# Altium PCB PCB1.PcbDoc
Units mm, origin at the board's own origin, x right, y up, seen from the top; angles counter-clockwise.
Board outline 44.75 x 46.5 mm, 2 copper layers (Top Layer, Bottom Layer); 20 components, 24 nets, 75 pads, 0 vias.
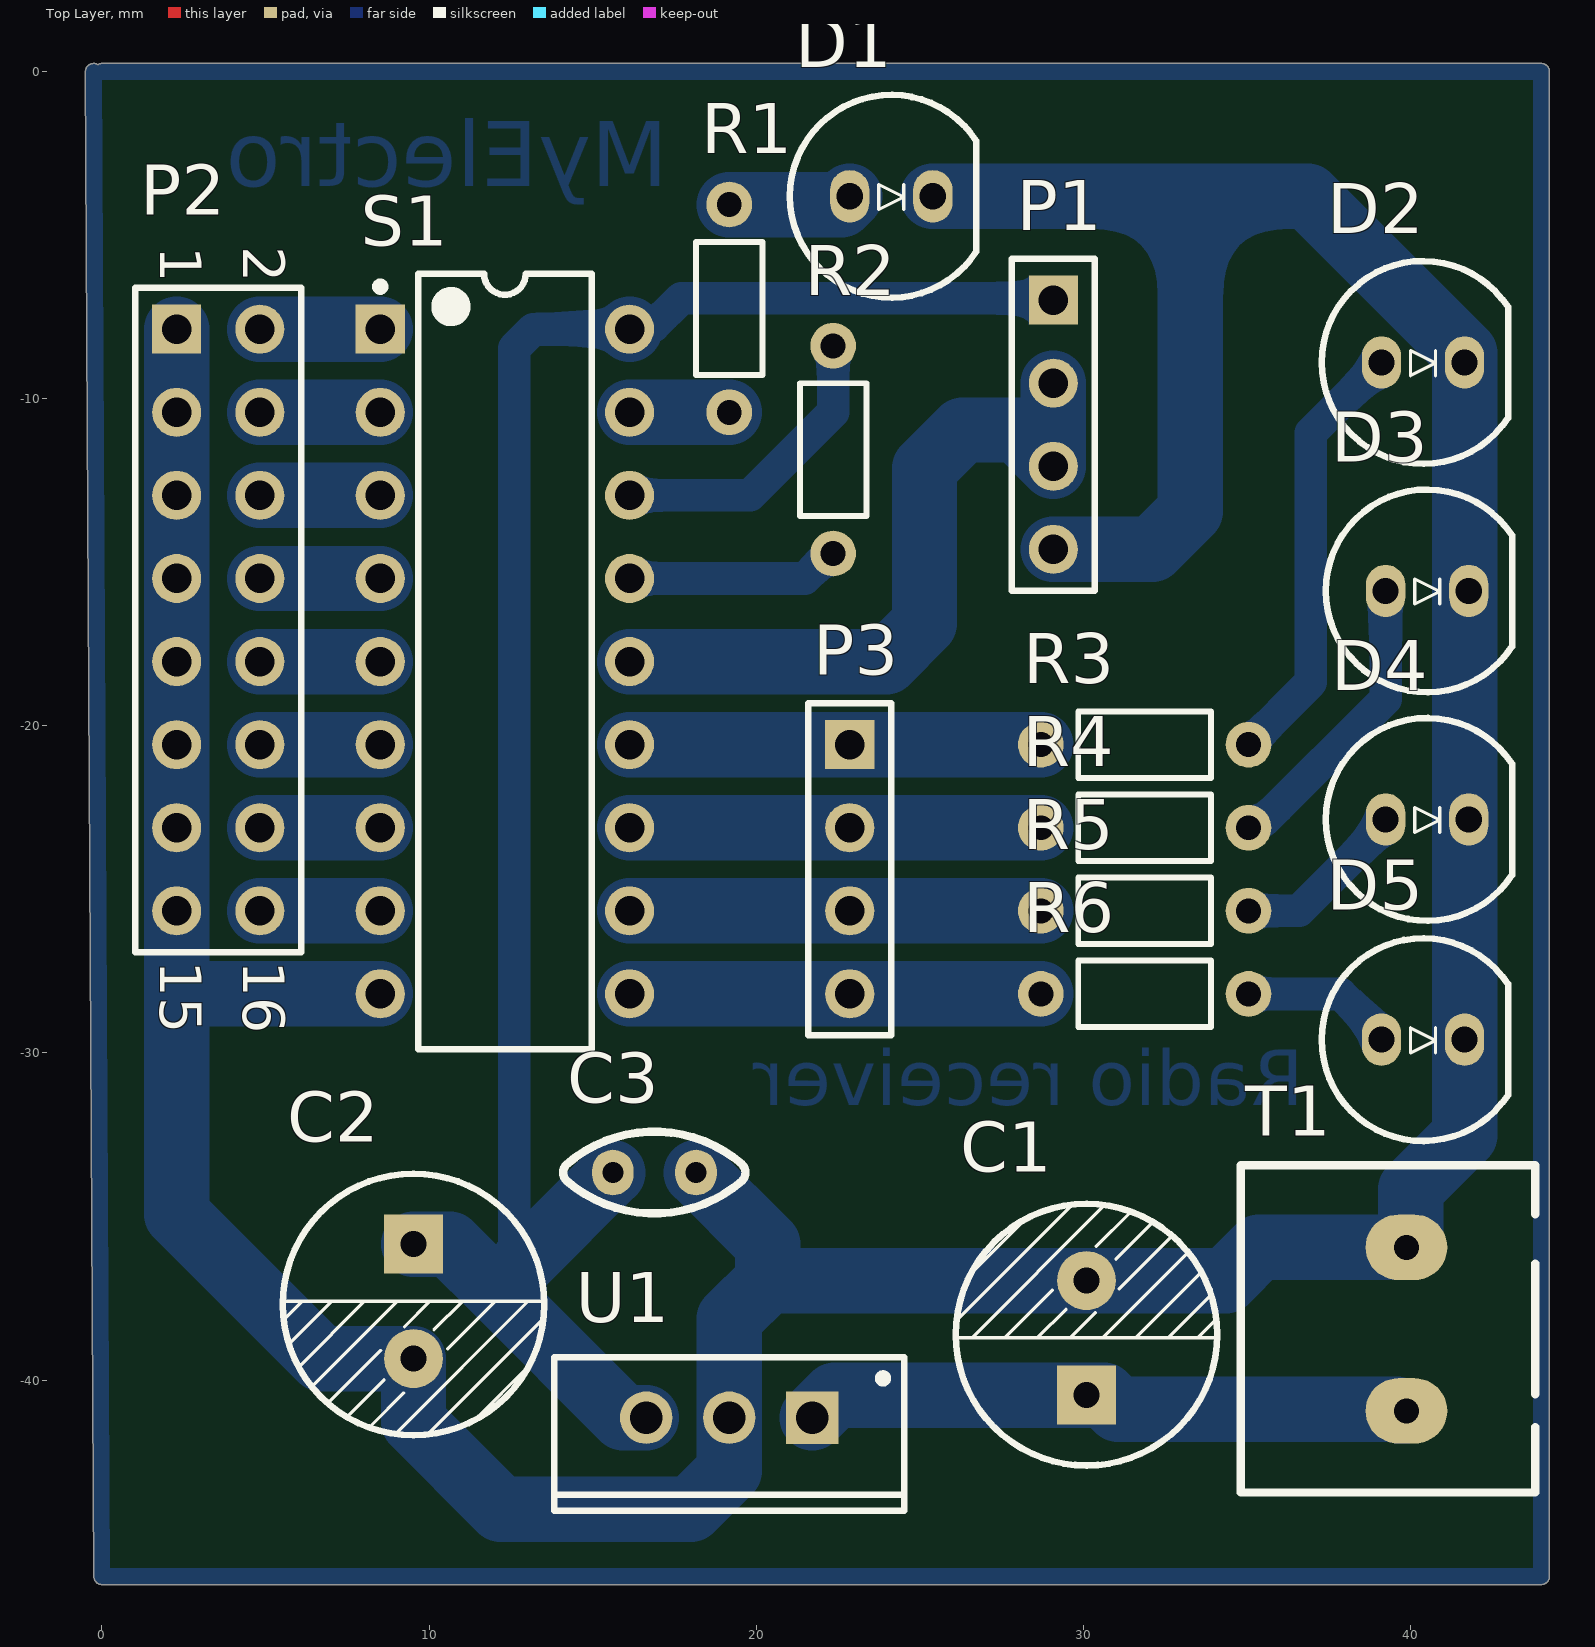
[diagram p0: Top Layer view]
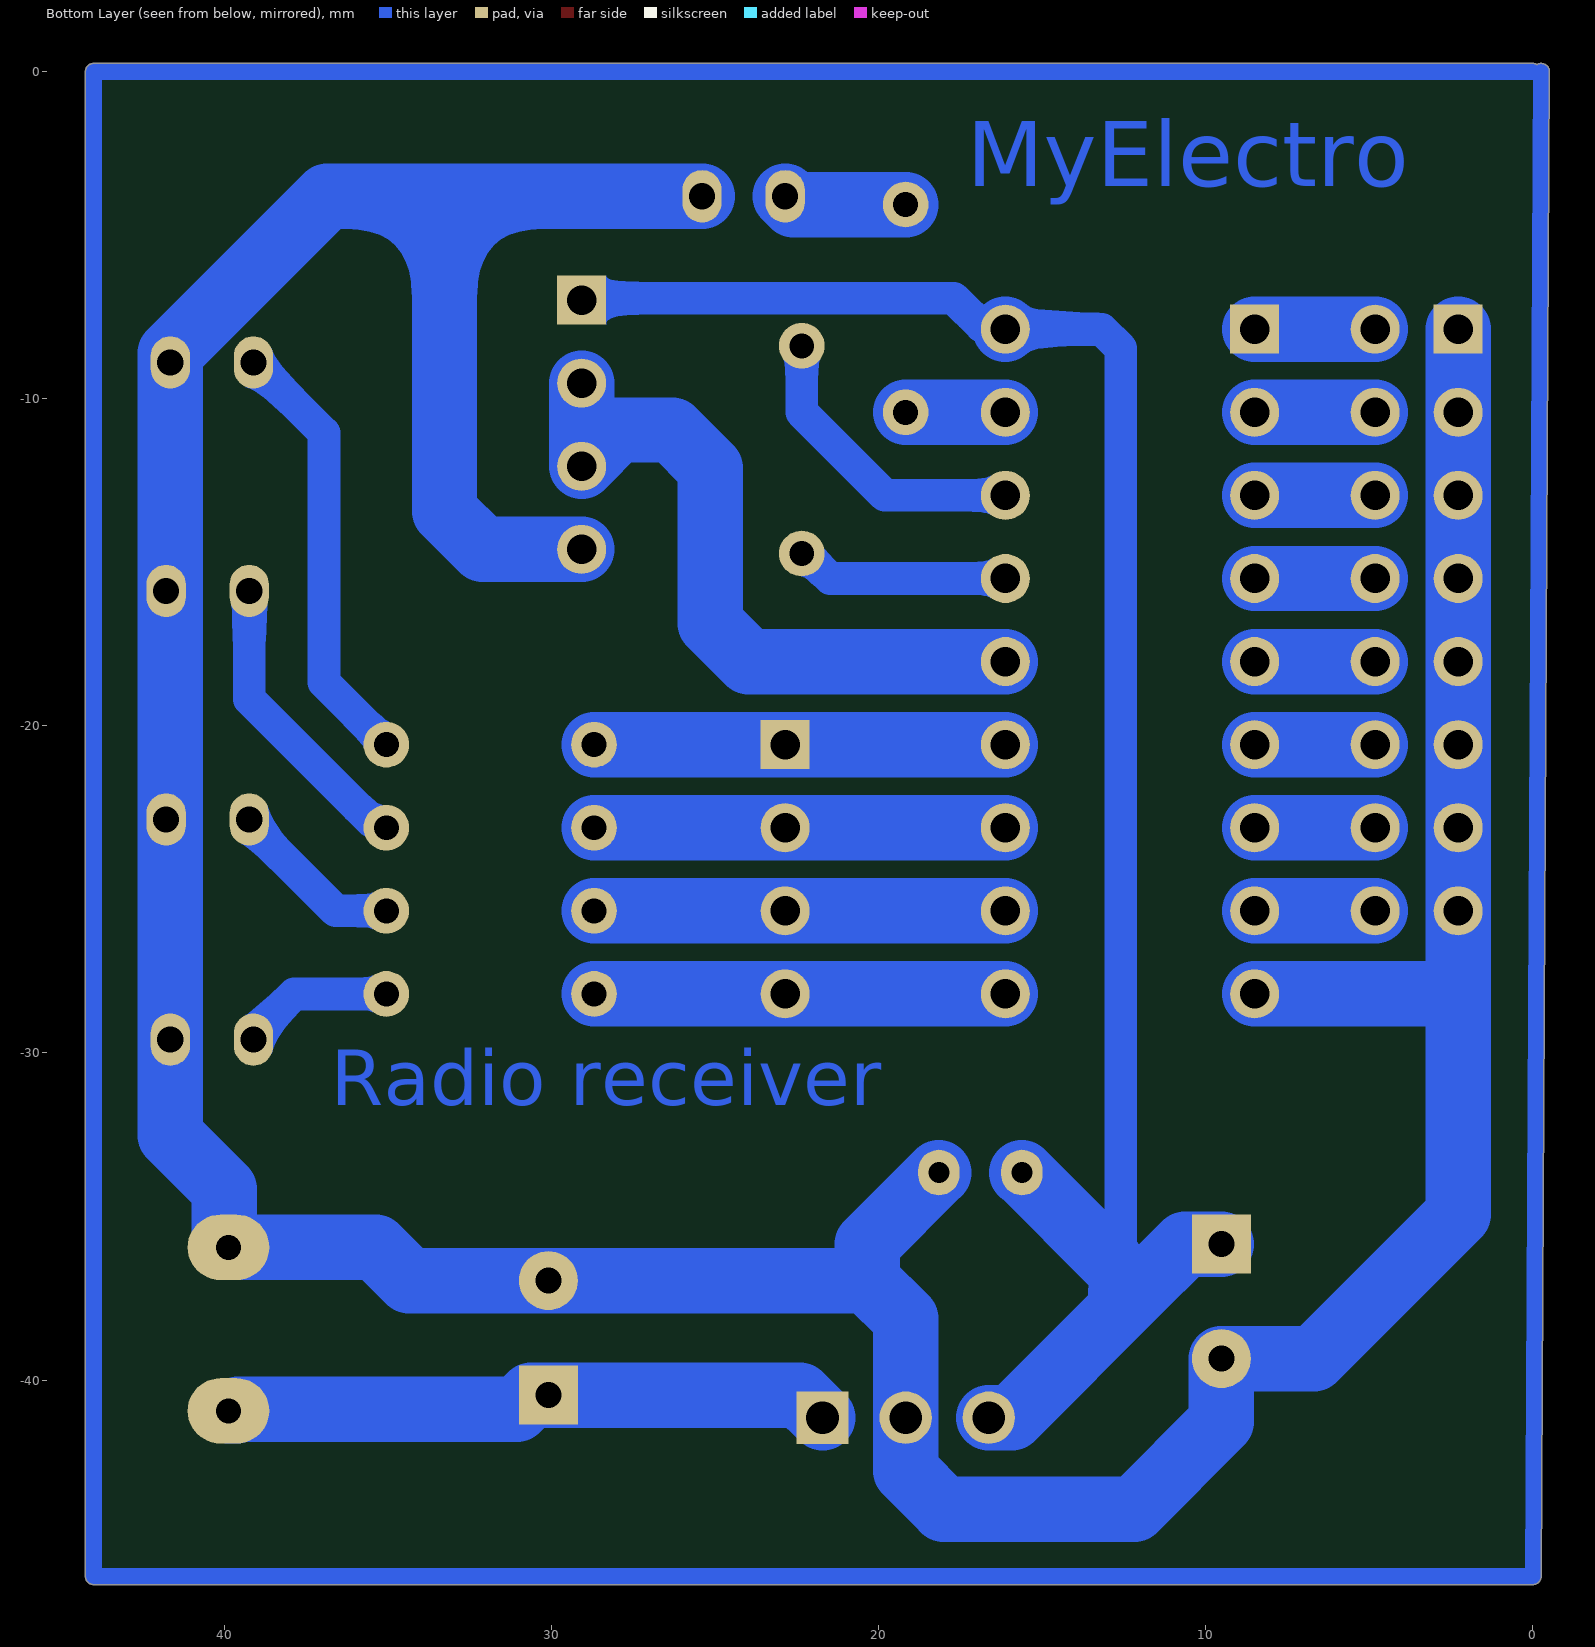
[diagram p1: Bottom Layer view, seen from below]
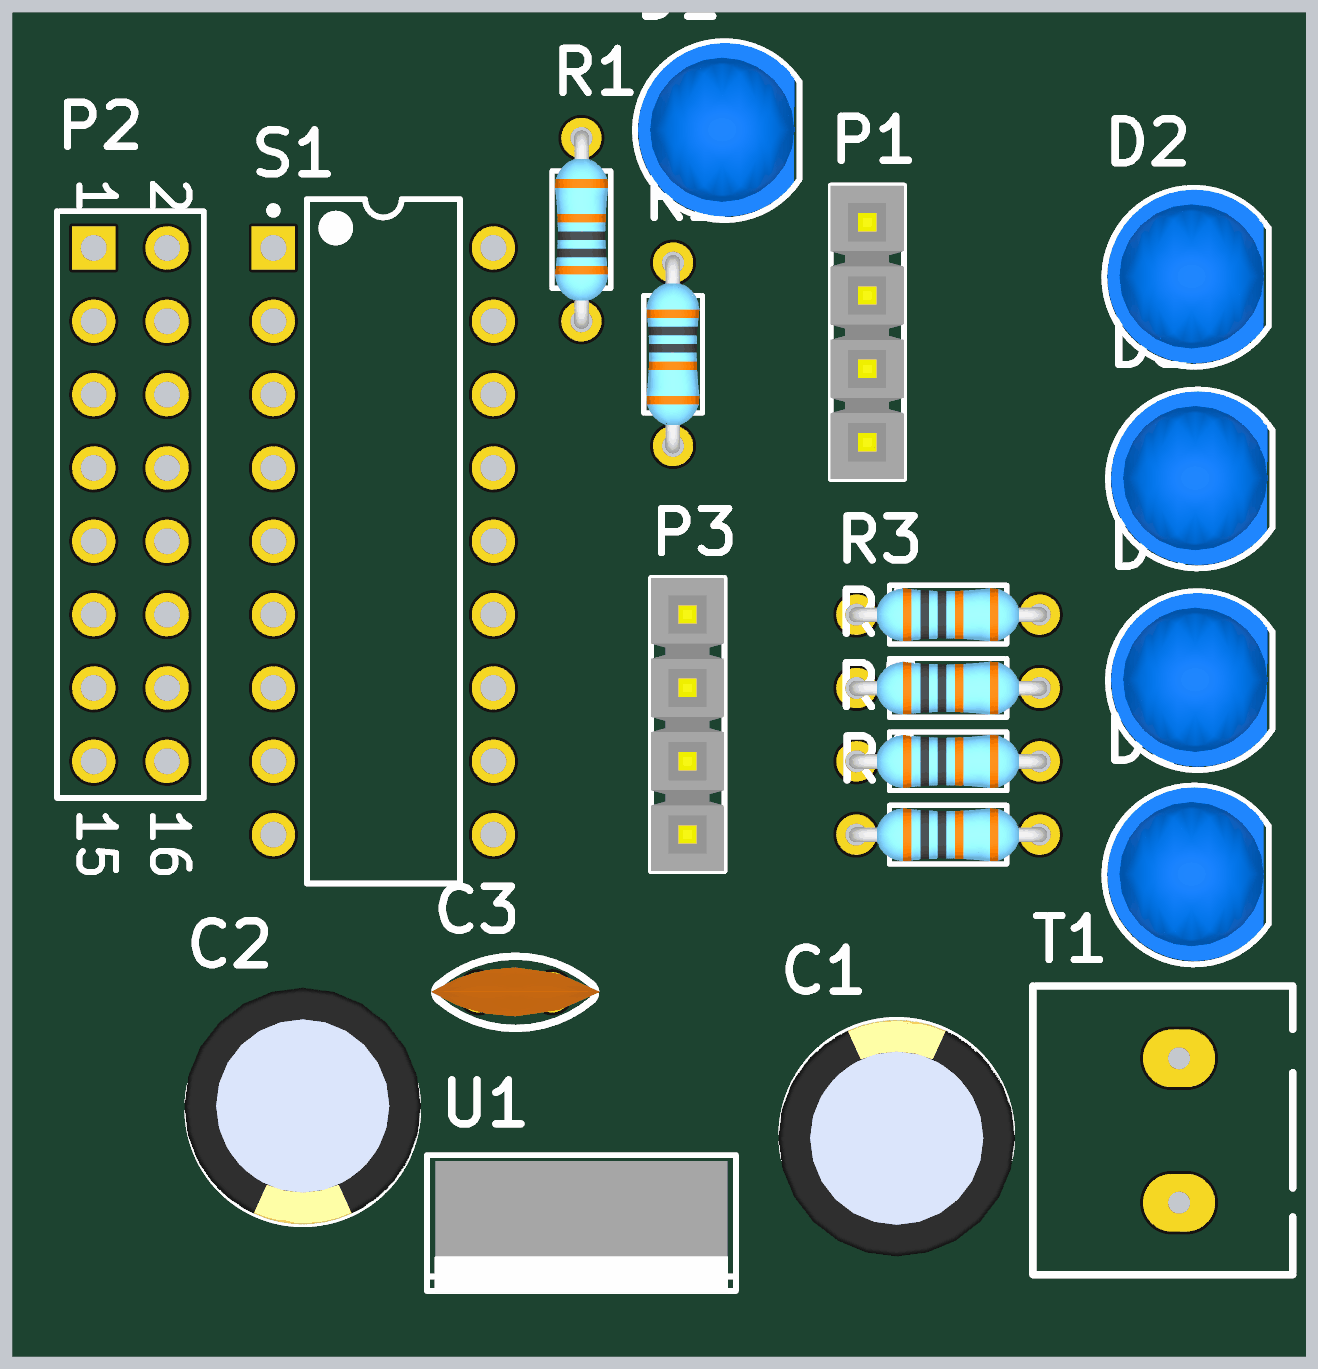
[diagram p2: 3D render of the assembled board from above, using the file's embedded part models]

## Layer stack, top to bottom
Top Solder: solder mask 0.0102, Solder Resist, Dk 3.5
Top Layer: signal copper 0.0356
Dielectric 1: dielectric 0.32, FR-4, Dk 4.8
Bottom Layer: signal copper 0.0356
Bottom Solder: solder mask 0.0102, Solder Resist, Dk 3.5

## Board outline
-0.25,-46.001 cw(c0,-45.999) -0.25,-46.001 -0.504,-0.001 cw(c-0.254,0) -0.127,0.216 cw(c0,0) 0,0.25 44,0.25 cw(c44,0) 44.25,0 44.25,-46 cw(c44,-46) 44,-46.25 0,-46.25 cw(c0,-46)

## Design rules (kind name [scope] priority, off if disabled: settings)
Clearance [All] p1: gap=0.254 ignorepadtopadclearanceinfootprint=FALSE except(0: Arc-Hole Track-Hole SMDPad-Hole THPad-Hole Via-Hole Fill-Hole Poly-Hole Region-Hole Text-Hole)
PolygonConnect [All] p1: connectstyle=Relief reliefconductorwidth=0.254 reliefentries=4 polygonreliefangle="90 Angle" airgapwidth=0.254
RoutingVias [All] p1: holewidth=0.711 width=1.27 viastyle="Through Hole" minholewidth=0.711 minwidth=1.27 maxholewidth=0.711 maxwidth=1.27
SolderMaskExpansion [All] p1: expansion=0.102 istentingtop=FALSE
Width [All] p1: maxlimit=2 minlimit=0.5 preferedwidth=1
30 further rules are at their usual default settings.

## Components (designator, comment, footprint, x,y, rotation, side; value= is the part's Value field where it differs from the comment)
C1 "100uf" "Cap electrolitic radial 8x14-3.5" 30.099,-38.707 r90 top value=1uF
C2 "100uf" "Cap electrolitic radial 8x14-3.5" 9.525,-37.592 r270 top value=1uF
C3 "100nF" Cap-100nF 16.891,-33.655 r180 top
D1 "LED 5MM" LED5MM_BLUE 24.13,-3.81 r0 top
D2 "LED 5MM" LED5MM_BLUE 40.386,-8.89 r0 top
D3 "LED 5MM" LED5MM_BLUE 40.513,-15.875 r0 top
D4 "LED 5MM" LED5MM_BLUE 40.513,-22.86 r0 top
D5 "LED 5MM" LED5MM_BLUE 40.386,-29.591 r0 top
P1 "Header 4" HDR1X4 29.083,-6.985 r270 top
P2 "Header 8X2" HDR2X8 2.286,-7.874 r270 top
P3 "Header 4" HDR1X4 22.86,-20.574 r270 top
R1 "220" RES-(1/4) 19.177,-7.239 r90 top
R2 "820K" RES-(1/4) 22.352,-11.557 r270 top
R3 "220" RES-(1/4) 31.877,-20.574 r0 top
R4 "220" RES-(1/4) 31.877,-23.114 r0 top
R5 "220" RES-(1/4) 31.877,-25.654 r0 top
R6 "220" RES-(1/4) 31.877,-28.194 r0 top
S1 "PT2272L4" DIP-18 12.319,-18.034 r0 top
T1 "Terminal" "Terminal 1*2" 43.815,-43.434 r90 top
U1 "L7805CV" "TO-220 AB" 19.177,-41.148 r180 top

## Footprints (in the part's own frame and the unit in brackets; to place one, negate y for a bottom-side part, rotate by r counter-clockwise, add the part's x,y. Pads: shape width x height; smd on the part's side, far side on the other; paste and mask are expansions set on the pad)
"Cap electrolitic radial 8x14-3.5" [mm] "Cap electrolitic radial 8x14-3.5-Design:Abbas Basereh"
  rect 1.8x1.8 hole 0.8: 1(-1.75,0)
  round 1.8 hole 0.8: 2(1.75,0)
  silkscreen extent -3.9,-4 4.1,4, body extent -4.1,-4.1 4.1,4.1, height 14.6
Cap-100nF [mil] "Bipolar Capacitor-Design:Ali Hafizi"
  oval 50x55 hole 25: 1(-50,0) 2(50,0)
  silkscreen extent -110,-49 110,49, body extent -115,-34 115,33, height 272
DIP-18 [mm] "DIP; 18 Leads; Row Spacing 7.62 mm; Pitch 2.54 mm"
  rect 1.5x1.5 hole 0.9: 1(-3.81,10.16)
  round 1.5 hole 0.9: 2(-3.81,7.62) 3(-3.81,5.08) 4(-3.81,2.54) 5(-3.81,0) 6(-3.81,-2.54) 7(-3.81,-5.08) 8(-3.81,-7.62) 9(-3.81,-10.16) 10(3.81,-10.16) 11(3.81,-7.62) 12(3.81,-5.08) 13(3.81,-2.54) 14(3.81,0) 15(3.81,2.54) 16(3.81,5.08) 17(3.81,7.62) 18(3.81,10.16)
  silkscreen extent -3.93,-11.85 2.65,11.85, body extent -3.6,-11.8 3.6,11.8, height 5.08
HDR1X4 [mm] "Connector; Header; 4 Position"
  rect 1.5x1.5 hole 0.9: 1(0,0)
  round 1.5 hole 0.9: 2(2.54,0) 3(5.08,0) 4(7.62,0)
  silkscreen extent -1.27,-1.27 8.89,1.27, body extent -1.27,-1.28 8.89,1.26, height 8.38
HDR2X8 [mm] "Connector; Header; 8x2 Position"
  rect 1.5x1.5 hole 0.9: 1(0,0)
  round 1.5 hole 0.9: 2(0,2.54) 3(2.54,0) 4(2.54,2.54) 5(5.08,0) 6(5.08,2.54) 7(7.62,0) 8(7.62,2.54) 9(10.16,0) 10(10.16,2.54) 11(12.7,0) 12(12.7,2.54) 13(15.24,0) 14(15.24,2.54) 15(17.78,0) 16(17.78,2.54)
  silkscreen extent -1.27,-1.27 19.05,3.81
LED5MM_BLUE [mm] "LED 5MM THROUGH HOLE BLUE-Designer Abbas Basereh"
  oval 1.2x1.6 hole 0.8: 1(-1.27,0) 2(1.27,0)
  silkscreen extent -3.1,-3.1 2.6,3.1, body extent -2.99,-2.98 2.43,3.04, height 12.31
RES-(1/4) [mil]
  round 55 hole 30: 1(-125,0) 2(125,0)
  silkscreen extent -80,-40 80,40, body extent -135,-36 135,36, height 115
"Terminal 1*2" [mil]
  oval 78.74x98.43 hole 30: 1(98.15,155) 2(295,155)
  silkscreen extent 0,0 394,354
"TO-220 AB" [mm] "Epoxy meets UL94, V0-Design:Abbas Basereh"
  rect 1.6x1.6 hole 1: 1(-2.54,0)
  round 1.6 hole 1: 2(0,0) 3(2.54,0)
  silkscreen extent -5.35,-1.85 5.35,2.85, body extent -5.08,-1.65 5.08,2.92, height 18.54

## Part data
C1 C2: library part "Cap ELECTROLITIC TOTAL SIZE", "Cap electrolitic radial", Data=16-12-2016, Designer="Abbas Basereh"
C3: library part "CAP CERAMIC TOTAL SIZE", "CAP Ceramic Total", Designer="Ali Hafizi"
D1 D2 D3 D4 D5: "Light Emitting Diode", Data=16-12-2016, Designer="Abbas Basereh"
P1 P3: "Header, 4-Pin", LatestRevisionDate=17-Jul-2002, LatestRevisionNote="Re-released for DXP Platform.", Publisher="Altium Limited"
P2: "Header, 8-Pin, Dual row", LatestRevisionDate=17-Jul-2002, LatestRevisionNote="Re-released for DXP Platform.", Publisher="Altium Limited"
R1 R2 R3 R4 R5 R6: library part "RES DIP PACKAGE", "TOTAL DIP RESISTOR PACK", Designer="Ali Hafizi"
S1: library part "SW DIP-9", "DIP Switch, 9 Position, SPST", Code_JEDEC=MO-036-AE, LatestRevisionDate=17-Jul-2002, LatestRevisionNote="Re-released for DXP Platform.", PackageReference=DIP-18, Published=24-Mar-1999, Publisher="Altium Limited"
T1: library part "Terminal 1*2", "Terminal 2 Pin 250VAC 16A", ComponentLinkURL=www.picpars.com, Designer="Seyed Mohsen Ghasemain", E-mail=picpars@gmail.com
U1: library part "L7805CV-Linear Voltage Regulator", "Linear Voltage Regulator IC Positive FIXED Output 5V 1.5A TO-220AB", Manufacturer=STMicroelectronics, Designer="Abbas Basereh", Link=https://www.aliexpress.com/item/, Part. No=L7805CV

## Nets (pads, with @x,y where several pads share a name; then routed paths per layer and width w, separated by ;. In a path a pad name is that pad's centre, name@x,y a point inside that pad or via, vN(x,y) a via of type N, cw(c..) or ccw(c..) an arc to the next point about the centre after c; other vN are vias at no path point)
+5: C2.1 C3.2 P1.1 S1.18 U1.3 | length 58.9
  Bottom Layer w1: 12.128,-37.338 12.573,-37.338 ; 12.601,-37.31 12.601,-36.068 12.601,-8.46 13.187,-7.874 S1.18 ; S1.18@16.86,-7.778 17.709,-6.929 29.027,-6.929 P1.1
  Bottom Layer w2: C2.1 10.633,-35.842 12.128,-37.338 15.938,-41.148 U1.3 ; 12.573,-37.338 12.601,-37.31 ; 12.898,-36.378 C3.2
+12: C1.1 T1.1 U1.1 | length 18.6
  Bottom Layer w2: U1.1 22.408,-40.457 30.626,-40.457 31.063,-40.894 39.581,-40.894 39.628,-40.941 T1.1
GND: C1.2 C2.2 C3.1 D1.2 D2.2 D3.2 D4.2 D5.2 P1.4 P2.1 P2.3 P2.5 P2.7 P2.9 P2.11 P2.13 P2.15 S1.9 T1.2 U1.2 | length 146.9
  Bottom Layer w2: P2.1 P2.3 P2.5 P2.7 P2.9 P2.11 P2.13 P2.15 2.286,-28.702 ; S1.9 2.794,-28.194 2.286,-28.702 ; C3.1 20.349,-35.843 20.349,-36.957 ; D1.2 33.274,-3.81 ; P1.4 32.102,-14.605 33.274,-13.433 33.274,-3.81 ; 2.286,-28.702 2.286,-34.925 6.703,-39.342 C2.2 9.525,-41.275 12.192,-43.942 18.005,-43.942 19.177,-42.77 19.177,-38.129 20.349,-36.957 ; 20.349,-36.957 C1.2 34.356,-36.957 35.372,-35.941 40.006,-35.941 40.006,-34.162 41.656,-32.512 D5.2 41.656,-22.86 41.656,-15.875 D2.2 41.656,-8.608 36.858,-3.81 33.274,-3.81
NetD1_1: D1.1 R1.2 | length 3.8
  Bottom Layer w2: R1.2 22.606,-4.064 D1.1
NetD2_1: D2.1 R3.2 | length 13.5
  Bottom Layer w1: R3.2 36.957,-18.669 36.957,-11.049 38.878,-9.128 39.024,-9.128 39.116,-9.036 D2.1
NetD3_1: D3.1 R4.2 | length 9.1
  Bottom Layer w1: R4.2 35.159,-23.114 35.358,-22.916 35.504,-22.916 39.243,-19.177 D3.1
NetD4_1: D4.1 R5.2 | length 5.4
  Bottom Layer w1: R5.2 36.595,-25.654 39.089,-23.16 39.243,-23.006 D4.1
NetD5_1: D5.1 R6.2 | length 4.7
  Bottom Layer w1: R6.2 37.865,-28.194 39.116,-29.445 D5.1
NetP1_2: P1.2 P1.3 S1.14 | length 21.7
  Bottom Layer w2: S1.14 23.974,-18.034 25.146,-16.862 25.146,-12.128 26.318,-10.956 27.974,-10.956 P1.3 P1.2
NetP2_2: P2.2 S1.1 | length 3.7
  Bottom Layer w2: P2.2 S1.1
NetP2_4: P2.4 S1.2 | length 3.7
  Bottom Layer w2: P2.4 S1.2
NetP2_6: P2.6 S1.3 | length 3.7
  Bottom Layer w2: P2.6 S1.3
NetP2_8: P2.8 S1.4 | length 3.7
  Bottom Layer w2: P2.8 S1.4
NetP2_10: P2.10 S1.5 | length 3.7
  Bottom Layer w2: P2.10 S1.5
NetP2_12: P2.12 S1.6 | length 3.7
  Bottom Layer w2: P2.12 S1.6
NetP2_14: P2.14 S1.7 | length 3.7
  Bottom Layer w2: P2.14 S1.7
NetP2_16: P2.16 S1.8 | length 3.7
  Bottom Layer w2: P2.16 S1.8
NetP3_1: P3.1 R3.1 S1.13 | length 12.6
  Bottom Layer w2: S1.13 25.654,-20.574 R3.1
NetP3_2: P3.2 R4.1 S1.12 | length 12.6
  Bottom Layer w2: S1.12 25.654,-23.114 R4.1
NetP3_3: P3.3 R5.1 S1.11 | length 12.6
  Bottom Layer w2: S1.11 25.654,-25.654 R5.1
NetP3_4: P3.4 R6.1 S1.10 | length 12.6
  Bottom Layer w2: S1.10 25.654,-28.194 R6.1
NetR1_1: R1.1 S1.17 | length 3
  Bottom Layer w2: S1.17 R1.1
NetR2_1: R2.1 S1.16 | length 9.3
  Bottom Layer w1: S1.16 19.812,-12.954 22.352,-10.414 R2.1
NetR2_2: R2.2 S1.15 | length 6.5
  Bottom Layer w1: S1.15 21.483,-15.494 22.245,-14.732 R2.2
copper on no net: | length 180
  Bottom Layer w0.5: -0.254,0 0,-45.999 44,-46 44,0 0,0

## Other copper
Bottom Layer:
  text "MyElectro" at 17.315,-3.506 h2
  text "Radio receiver" at 36.746,-31.604 h1.7

## Text inside footprints (layer, text, board x,y; h text height)
P2: Top Overlay "2" at 4.318,-5.334 h1.27 r270; Top Overlay "1" at 1.778,-5.334 h1.27 r270; Top Overlay "15" at 1.778,-27.178 h1.27 r270; Top Overlay "16" at 4.318,-27.178 h1.27 r270